# Altium PCB PCB1.PcbDoc
Units mil, origin at the board's own origin, x right, y up, seen from the top; angles counter-clockwise.
Board outline 6000 x 4000 mil, 2 copper layers (Top Layer, Bottom Layer); 22 components, 10 nets, 67 pads, 0 vias.
Unrouted connection lines stored in the file: 42.
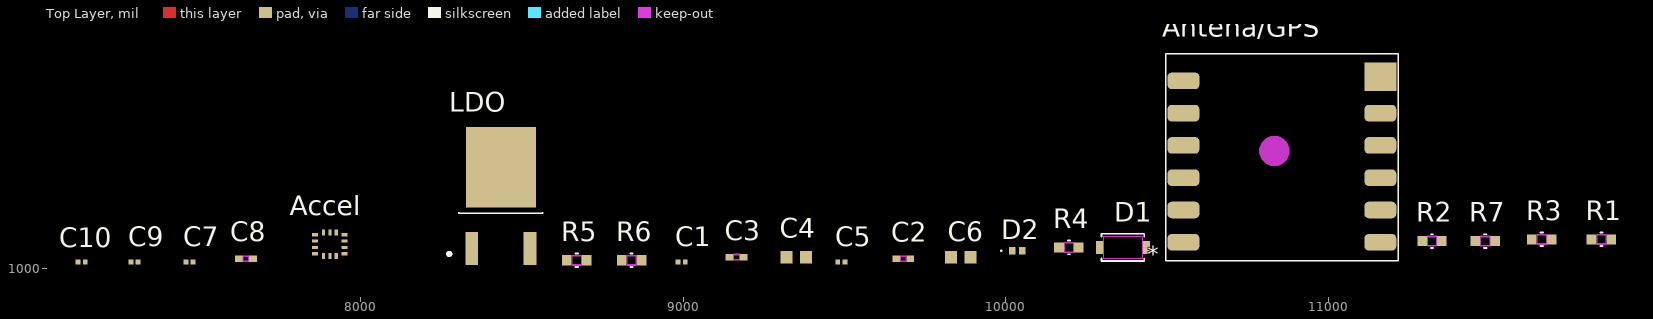
[diagram p0: Top Layer view]
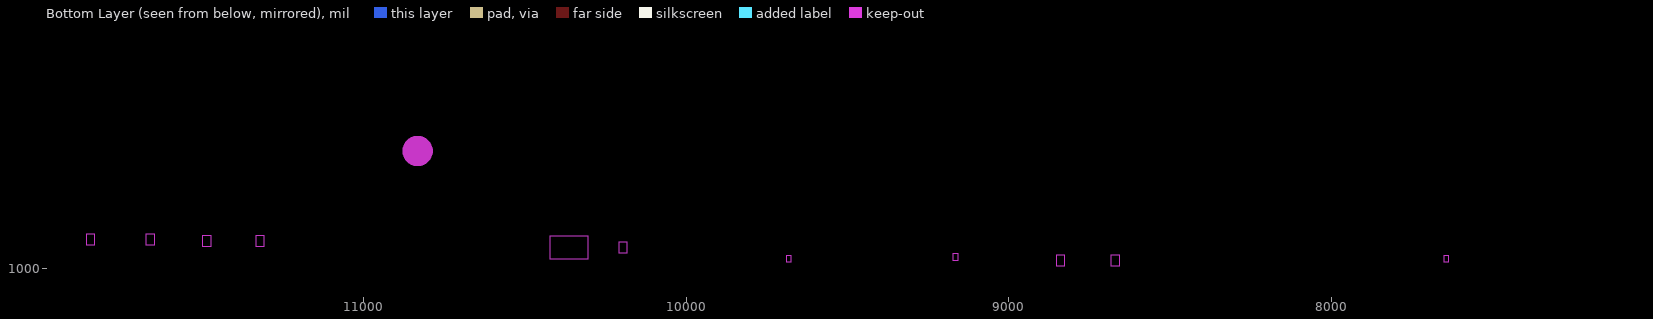
[diagram p1: Bottom Layer view, seen from below]

## Layer stack, top to bottom
Top Solder: solder mask 0.4, Solder Resist, Dk 3.5
Top Layer: signal copper 1.4
Dielectric 1: dielectric 12.6, FR-4, Dk 4.8
Bottom Layer: signal copper 1.4
Bottom Solder: solder mask 0.4, Solder Resist, Dk 3.5

## Board outline
1000,1000 7000,1000 7000,5000 1000,5000

## Design rules (kind name [scope] priority, off if disabled: settings)
Clearance [All] p1: gap=10 ignorepadtopadclearanceinfootprint=FALSE
PolygonConnect [All] p1: connectstyle=Relief reliefconductorwidth=10 reliefentries=4 polygonreliefangle="90 Angle" airgapwidth=10
RoutingVias [All] p1: holewidth=28 width=50 viastyle="Through Hole" minholewidth=28 minwidth=50 maxholewidth=28 maxwidth=50
SolderMaskExpansion [All] p1: expansion=4 istentingtop=FALSE
SupplyNets "Schematic Supply Nets_2" [InNet('+3.3V')] p1: voltage=0.000
SupplyNets "Schematic Supply Nets_1" [InNet('+5V')] p2: voltage=0.000
SupplyNets "Schematic Supply Nets" [InNet('GND')] p3: voltage=0.000
Width [All] p1: maxlimit=10 minlimit=10 preferedwidth=10
30 further rules are at their usual default settings.

## Components (designator, comment, footprint, x,y, rotation, side; value= is the part's Value field where it differs from the comment)
Accel "LSM6DSO32" "14-LGA - STMicroelectronics V4" 7905,1075 r0 top
Antena/GPS "Quectel LC86G" Quectel-LC86L 10855,1345 r0 top
C1 "100nF" CAPC0603X33N 8995,1020 r0 top
C2 "33pF" CAP_CL05_SAM 9681.76,1030 r180 top
C3 "33pF" CAP_CL05_SAM 9165,1035 r180 top
C4 "4.7µF" 0603-capacitor4.7uf 9350,1035 r0 top
C5 "100nF" CAPC0603X33N 9490,1020 r0 top
C6 "4.7µF" 0603-capacitor4.7uf 9860,1035 r0 top
C7 "100nF" CAPC0603X33N 7470,1020 r0 top
C8 "10µF" CAP_CL05_SAM 7645,1030 r0 top
C9 "100nF" CAPC0603X33N 7300,1020 r0 top
C10 "100nF" CAPC0603X33N 7136.06,1020 r180 top
D1 "SMD110PL-TP" SOD-123FL_MCC 10362.5,1065 r180 top
D2 "CSPSBULC3V3LB-TP" CSPSBULC3V3LBTP 10035,1055 r0 top
LDO "LD1117" "DPAK-LD1117DT33TR V2" 8435,1225 r90 top
R1 "1kΩ" RC0603N_YAG 11845,1090 r180 top
R2 "1kΩ" RC0603N_YAG 11320,1085 r180 top
R3 "5.6kΩ" RC0603N_YAG 11660,1090 r180 top
R4 "1kΩ" RC0603N_YAG 10195,1065 r180 top
R5 "10kΩ" RC0603N_YAG 8670,1025 r180 top
R6 "10kΩ" RC0603N_YAG 8840,1025 r180 top
R7 "10kΩ" RC0603N_YAG 11485,1085 r180 top

## Footprints (in the part's own frame and the unit in brackets; to place one, negate y for a bottom-side part, rotate by r counter-clockwise, add the part's x,y. Pads: shape width x height; smd on the part's side, far side on the other; paste and mask are expansions set on the pad)
"14-LGA - STMicroelectronics V4" [mm] "LGA, 14-Leads, Body 3,00x2,50mmx0,86mm, Pitch 0,50mm"
  rect 0.475x0.25 smd: 1(-1.162,0.75) 2(-1.162,0.25) 3(-1.162,-0.25) 4(-1.162,-0.75) 8(1.163,-0.75) 9(1.163,-0.25) 10(1.163,0.25) 11(1.163,0.75)
  rect 0.25x0.475 smd: 5(-0.5,-0.912) 6(0,-0.912) 7(0.5,-0.912) 12(0.5,0.912) 13(0,0.912) 14(-0.5,0.912)
  body extent -1.55,-1.3 1.55,1.3, height 0.86
0603-capacitor4.7uf [mm] "Chip Capacitor, 2-Leads, Body 1,60x0,80mm, IPC Medium Density"
  rect 0.95x1 smd: 1(-0.775,0) 2(0.775,0)
  body extent -0.9,-0.5 0.9,0.5, height 0.9
CAP_CL05_SAM [mm]
  rect 0.606x0.5 smd paste+0 mask+0: 1(-0.553,0) 2(0.553,0)
  Top Layer keep-out region: -0.199,-0.199 -0.199,0.199 0.199,0.199 0.199,-0.199
  Keep-Out Layer region: -0.199,-0.25 -0.199,0.25 0.199,0.25 0.199,-0.25
  body extent -0.5,-0.25 0.5,0.25, height 0.55
CAPC0603X33N [mm]
  rect 0.38x0.4 smd: 1(-0.281,0) 2(0.281,0)
  body extent -0.3,-0.15 0.3,0.15, height 0.33
CSPSBULC3V3LBTP [mm]
  rect 0.5x0.6 smd: 1(-0.4,0) 2(0.4,0)
  silkscreen extent -1.3,-0.05 -1.2,0.05, body extent -0.6,-0.3 0.6,0.3, height 0.65
"DPAK-LD1117DT33TR V2" [mm]
  rect 2.6x1 smd: 1(-4.15,2.29) 3(-4.15,-2.29)
  rect 6.3x5.5 smd: 2(2.25,0)
  silkscreen extent -4.7,-3.3 -1.3,4.19, body extent -3.88,-3.3 5.85,3.3, height 2.43
Quectel-LC86L [mm]
  rrect50% 2.5x1.3 smd: 1(-7.75,5.999) 2(-7.75,3.459) 3(-7.75,0.919) 4(-7.75,-1.621) 5(-7.75,-4.161) 6(-7.75,-6.701) 7(7.75,-6.701) 8(7.75,-4.161) 9(7.75,-1.621) 10(7.75,0.919) 11(7.75,3.459)
  rect 2.5x2.25 smd: 12(7.75,6.326)
  Keep-Out Layer circle w1.2: c-0.59,0.482 r0.6
  silkscreen extent -9.15,-8.15 9.15,8.15, body extent -8.01,-8 8,8.03, height 6.95
RC0603N_YAG [mil]
  rect 30x32 smd paste+0 mask+0: 1(-30.5,0) 2(30.5,0)
  Top Layer keep-out region: -13.5,-14 -13.5,14 13.5,14 13.5,-14
  Keep-Out Layer region: -13.5,-16 -13.5,16 13.5,16 13.5,-16
  silkscreen extent -3,-21 3,21, body extent -31,-16 31,16, height 28
SOD-123FL_MCC [mil]
  rect 23x41 smd paste+0 mask+0: 1(-72.5,0) 2(72.5,0)
  Top Layer keep-out region: -59,-35.5 -59,35.5 59,35.5 59,-35.5
  Keep-Out Layer region: -59,-35.5 -59,35.5 59,35.5 59,-35.5
  silkscreen extent -66,-43 66,43, body extent -76,-37 76,37, height 75

## Part data
Accel: "Accelerometer and 3D Gyroscope 3D Always-On 1.71V to 3.6V 0.55mA 14-Pin LGA T/R", Manufacturer=STMicroelectronics, Manufacturer Part Number=LSM6DSO32TR, Max Operating Temperature=85°C, Max Supply Voltage=3.6V, Min Operating Temperature=-40°C, Min Supply Voltage=1.71V, Operating Supply Current=550µA, Operating Supply Voltage=1.8V, Supplier Part Number=497-LSM6DSO32CT-ND, Body Material=Plastic, Category="Inertial Measurement Units (IMUs)", China RoHS=Compliant, ComponentLink1Description=https://datasheet.octopart.com:443/LSM6DSO32TR-STMicroelectronics-datasheet-152560011.pdf?src-supplier=Upverter, ComponentLink1URL=https://datasheet.octopart.com:443/LSM6DSO32TR-STMicroelectronics-datasheet-152560011.pdf?src-supplier=Upverter, Height=860µm, Length=3mm, Lifecycle Status=Production, Mounting Technology="Surface Mount", Number of Terminals=14, Output Configuration=Digital, Output Type=Digital, Pricing="1=3,64, 5=3,258, 10=3,115, 25=2,9448, 50=2,8282, 100=2,7213, 500=2,5064, 1000=2,45778 (USD)", REACH SVHC=Yes, RoHS=Compliant, Stock=5000, Supplier=DigiKey, Supplier 1=DigiKey, Supplier Part Number 1=497-LSM6DSO32CT-ND
Antena/GPS: "GNSS Module, BeiDou, Galileo, GLONASS, GPS, QZSS, 1.605375GHz, -166 dBm, 25 s, 2.55V to 3.6V", Manufacturer=Quectel, Manufacturer Part Number=LC86GLAMD, Max Operating Temperature=85°C, Min Operating Temperature=-40°C, Operating Supply Voltage=3.3V, Supplier Part Number=2958-LC86GLAMDCT-ND, Category="RF Transceiver Modules and Modems", ComponentLink1Description=https://datasheet.octopart.com:443/LC86GLAMD-Quectel-datasheet-165835560.pdf?src-supplier=SOS+electronic, ComponentLink1URL=https://datasheet.octopart.com:443/LC86GLAMD-Quectel-datasheet-165835560.pdf?src-supplier=SOS+electronic, Height - Seated (Max)=6.95mm, Length=18.4mm, Number of Circuits=1, Number of Terminals=36, Pricing="1=10,82, 10=9,402, 25=8,908, 100=8,2298 (USD)", Stock=191, Supplier=DigiKey, Supplier 1=DigiKey, Supplier Part Number 1=2958-LC86GLAMDCT-ND, Width=18.4mm
C1 C5 C7 C9 C10: library part "CAP - GENERIC", "0201 0.1 uF 16 V ±10% Tolerance X7S Multilayer Ceramic Chip Capacitor", .Case/Package=0201, .Voltage Rating (DC)=16V, Case Code (Metric)=0603, Dielectric=X7S, Dielectric Material=Ceramic, Manufacturer=Murata, Manufacturer Lifecycle Status="IN PRODUCTION", Manufacturer Part Number=GRM033C71C104KE14D, Max Operating Temperature=125°C, Min Operating Temperature=-55°C, Supplier Part Number=490-10387-1-ND, Tolerance=10%, Case Code (Imperial)=0201, Case/Package=0201, Category="Ceramic Capacitors", ComponentLink1Description=https://datasheet.octopart.com:443/GRM033C71C104KE14D-Murata-datasheet-178521774.pdf?src-supplier=Arrow.cn, ComponentLink1URL=https://datasheet.octopart.com:443/GRM033C71C104KE14D-Murata-datasheet-178521774.pdf?src-supplier=Arrow.cn, ComponentLink2Description=https://datasheet.octopart.com:443/GRM033C71C104KE14D-Murata-datasheet-150009099.pdf?src-supplier=Arrow.cn, ComponentLink2URL=https://datasheet.octopart.com:443/GRM033C71C104KE14D-Murata-datasheet-150009099.pdf?src-supplier=Arrow.cn, ComponentLink3Description=https://datasheet.octopart.com:443/GRM033C71C104KE14D-Murata-datasheet-165579666.pdf?src-supplier=TME, ComponentLink3URL=https://datasheet.octopart.com:443/GRM033C71C104KE14D-Murata-datasheet-165579666.pdf?src-supplier=TME, ComponentLink4Description=https://datasheet.octopart.com:443/GRM033C71C104KE14D-Murata-datasheet-141274204.pdf?src-supplier=Ciiva, ComponentLink4URL=https://datasheet.octopart.com:443/GRM033C71C104KE14D-Murata-datasheet-141274204.pdf?src-supplier=Ciiva, ComponentLink5Description=https://datasheet.octopart.com:443/GRM033C71C104KE14D-Murata-datasheet-140675366.pdf?src-supplier=Ciiva, ComponentLink5URL=https://datasheet.octopart.com:443/GRM033C71C104KE14D-Murata-datasheet-140675366.pdf?src-supplier=Ciiva, ComponentLink6Description=https://datasheet.octopart.com:443/GRM033C71C104KE14D-Murata-datasheet-138738157.pdf?src-supplier=Ciiva, ComponentLink6URL=https://datasheet.octopart.com:443/GRM033C71C104KE14D-Murata-datasheet-138738157.pdf?src-supplier=Ciiva, ComponentLink7Description=https://datasheet.octopart.com:443/GRM033C71C104KE14D-Murata-datasheet-22122223.pdf?src-supplier=Future+Electronics, ComponentLink7URL=https://datasheet.octopart.com:443/GRM033C71C104KE14D-Murata-datasheet-22122223.pdf?src-supplier=Future+Electronics, ComponentLink8Description=https://datasheet.octopart.com/GRM033C71C104KE14D-Murata-datasheet-12515295.pdf, ComponentLink8URL=https://datasheet.octopart.com/GRM033C71C104KE14D-Murata-datasheet-12515295.pdf, ComponentLink9Description=https://datasheet.octopart.com/GRM033C71C104KE14D-Murata-datasheet-12510076.pdf, ComponentLink9URL=https://datasheet.octopart.com/GRM033C71C104KE14D-Murata-datasheet-12510076.pdf, ComponentLink10Description=https://datasheet.octopart.com/GRM033C71C104KE14D-Murata-datasheet-11978611.pdf, ComponentLink10URL=https://datasheet.octopart.com/GRM033C71C104KE14D-Murata-datasheet-11978611.pdf, ComponentLink11Description=https://datasheet.octopart.com/GRM033C71C104KE14D-Murata-datasheet-10025737.pdf, ComponentLink11URL=https://datasheet.octopart.com/GRM033C71C104KE14D-Murata-datasheet-10025737.pdf, ComponentLink12Description=https://datasheet.octopart.com/GRM033C71C104KE14D-Murata-datasheet-8819587.pdf, ComponentLink12URL=https://datasheet.octopart.com/GRM033C71C104KE14D-Murata-datasheet-8819587.pdf, ComponentLink13Description=http://sigma.octopart.com:80/reach_statement/Murata-company-16.pdf?src-supplier=Compliance+Statements, ComponentLink13URL=http://sigma.octopart.com:80/reach_statement/Murata-company-16.pdf?src-supplier=Compliance+Statements, Height=300µm, Length=600µm, Lifecycle Status=Production, Material=Ceramic, Mounting Technology="Surface Mount", Number of Terminals=2, Packaging=Digi-Reel®, Pricing="1=0,08, 10=0,006, 50=0,0048, 100=0,004 (USD)", REACH SVHC=Yes, RoHS=Compliant, Schedule B="8532240020, 8532240020|8532240020, 8532240020|8532240020|8532240020, 8532240020|8532240020|8532240020|8532240020", Stock=10213357, Supplier=DigiKey, Supplier 1=DigiKey, Supplier Part Number 1=490-10387-1-ND, Termination=SMD/SMT, Thickness=300µm, Voltage Rating=16V, Voltage Rating (DC)=16V, Weight=340.194278µg, Width=300µm
C2 C3: library part "CAP - GENERIC", "Ceramic Capacitor, Multilayer, Ceramic, 50V, 5% +Tol, 5% -Tol, C0G, 0+-30ppm/Celcius TC, 33pF, Surface Mount, 0402 inch", .Case/Package=0402, .Voltage Rating (DC)=50V, Case Code (Metric)=1005, Dielectric=C0G, Dielectric Material=Ceramic, Manufacturer="Samsung Electro-Mechanics", Manufacturer Part Number=CL05C330JB5NNNC, Max Operating Temperature=125°C, Min Operating Temperature=-55°C, Supplier Part Number=1276-1272-1-ND, Temperature Coefficient=30ppm/°C, Tolerance=5%, Case Code (Imperial)=0402, Case/Package=0402, Category="Ceramic Capacitors", China RoHS=Compliant, ComponentLink1Description=https://datasheet.octopart.com:443/CL05C330JB5NNNC-Samsung-Electro-Mechanics-datasheet-136482269.pdf?src-supplier=IHS, ComponentLink1URL=https://datasheet.octopart.com:443/CL05C330JB5NNNC-Samsung-Electro-Mechanics-datasheet-136482269.pdf?src-supplier=IHS, ComponentLink2Description=https://datasheet.octopart.com:443/CL05C330JB5NNNC-Samsung-Electro-Mechanics-datasheet-141347004.pdf?src-supplier=Samsung+SCT, ComponentLink2URL=https://datasheet.octopart.com:443/CL05C330JB5NNNC-Samsung-Electro-Mechanics-datasheet-141347004.pdf?src-supplier=Samsung+SCT, ComponentLink3Description=https://datasheet.octopart.com:443/CL05C330JB5NNNC-Samsung-Electro-Mechanics-datasheet-110326805.pdf?src-supplier=Future+Electronics, ComponentLink3URL=https://datasheet.octopart.com:443/CL05C330JB5NNNC-Samsung-Electro-Mechanics-datasheet-110326805.pdf?src-supplier=Future+Electronics, ComponentLink4Description=https://datasheet.octopart.com:443/CL05C330JB5NNNC-Samsung-Electro-Mechanics-datasheet-81461748.pdf?src-supplier=Future+Electronics, ComponentLink4URL=https://datasheet.octopart.com:443/CL05C330JB5NNNC-Samsung-Electro-Mechanics-datasheet-81461748.pdf?src-supplier=Future+Electronics, ComponentLink5Description=https://datasheet.octopart.com:443/CL05C330JB5NNNC-Samsung-datasheet-12522687.pdf?src-supplier=Future+Electronics, ComponentLink5URL=https://datasheet.octopart.com:443/CL05C330JB5NNNC-Samsung-datasheet-12522687.pdf?src-supplier=Future+Electronics, ComponentLink6Description=https://datasheet.octopart.com:443/CL05C330JB5NNNC-Samsung-datasheet-26589087.pdf?src-supplier=Future+Electronics, ComponentLink6URL=https://datasheet.octopart.com:443/CL05C330JB5NNNC-Samsung-datasheet-26589087.pdf?src-supplier=Future+Electronics, ComponentLink7Description=https://datasheet.octopart.com:443/CL05C330JB5NNNC-Samsung-Electro-Mechanics-datasheet-149156440.pdf?src-supplier=Future+Electronics, ComponentLink7URL=https://datasheet.octopart.com:443/CL05C330JB5NNNC-Samsung-Electro-Mechanics-datasheet-149156440.pdf?src-supplier=Future+Electronics, ComponentLink8Description=https://datasheet.octopart.com:443/CL05C330JB5NNNC-Samsung-datasheet-37081328.pdf?src-supplier=Future+Electronics, ComponentLink8URL=https://datasheet.octopart.com:443/CL05C330JB5NNNC-Samsung-datasheet-37081328.pdf?src-supplier=Future+Electronics, ComponentLink9Description=https://datasheet.octopart.com/CL05C330JB5NNNC-Samsung-Electro-Mechanics-datasheet-97040617.pdf, ComponentLink9URL=https://datasheet.octopart.com/CL05C330JB5NNNC-Samsung-Electro-Mechanics-datasheet-97040617.pdf, ComponentLink10Description=https://datasheet.octopart.com/CL05C330JB5NNNC-Samsung-Electro-Mechanics-datasheet-8324245.pdf, ComponentLink10URL=https://datasheet.octopart.com/CL05C330JB5NNNC-Samsung-Electro-Mechanics-datasheet-8324245.pdf, ComponentLink11Description=https://datasheet.octopart.com:443/CL05C330JB5NNNC-Samsung-datasheet-8326407.pdf?src-supplier=TME, ComponentLink11URL=https://datasheet.octopart.com:443/CL05C330JB5NNNC-Samsung-datasheet-8326407.pdf?src-supplier=TME, Contact Plating=Tin, Depth=500µm, Height=550µm, Lead Free="Lead Free", Length=1mm, Lifecycle Status=Production, Material=Ceramic, Mounting Technology="Surface Mount", Number of Terminals=2, Pricing="1=0,08, 10=0,003 (USD)", Radiation Hardening=No, REACH SVHC=Yes, RoHS=Compliant, Schedule B="8532240020, 8532240020|8532240020, 8532240020|8532240020|8532240020, 8532240020|8532240020|8532240020|8532240020", Stock=3272452, Supplier=DigiKey, Supplier 1=DigiKey, Supplier Part Number 1=1276-1272-1-ND, Thickness=558.8µm, Voltage=50V, Voltage Rating=50V, Voltage Rating (DC)=50V, Width=500µm
C4 C6: library part "CAP - GENERIC", "Ceramic Capacitor, Multilayer, Ceramic, 10V, 10% +Tol, 10% -Tol, X7R, 15% TC, 4.7uF, Surface Mount, 0603", .Case/Package=0603, .Voltage Rating (DC)=10V, Dielectric Material=Ceramic, Manufacturer="Cal-Chip Electronics", Manufacturer Part Number=GMC10X7R475K10NT, Max Operating Temperature=125°C, Min Operating Temperature=-55°C, Supplier Part Number=4713-GMC10X7R475K10NTCT-ND, Category="Ceramic Capacitors", China RoHS=Compliant, ComponentLink1Description=https://datasheet.octopart.com:443/GMC10X7R475K10NT-Cal-Chip-Electronics-datasheet-182028815.pdf?src-supplier=IHS, ComponentLink1URL=https://datasheet.octopart.com:443/GMC10X7R475K10NT-Cal-Chip-Electronics-datasheet-182028815.pdf?src-supplier=IHS, Height=900µm, Length=1.6mm, Lifecycle Status=Production, Mounting Technology="Surface Mount", Number of Terminals=2, Pricing="1=0,26, 10=0,154, 50=0,1112, 100=0,0982, 500=0,07628, 1000=0,06951, 4000=0,05938, 8000=0,05562, 12000=0,05374, 20000=0,05165, 28000=0,05043, 40000=0,04926, 48000=0,0487, 96000=0,04683, 100000=0,04673 (USD)", REACH SVHC=Yes, RoHS=Compliant, Stock=237673, Supplier=DigiKey, Supplier 1=DigiKey, Supplier Part Number 1=4713-GMC10X7R475K10NTCT-ND, Voltage Rating (DC)=10V, Width=800µm
C8: library part "CAP - GENERIC", "6.3V 10uF X5R ±20% 0402 Multilayer Ceramic Capacitors MLCC - SMD/SMT ROHS", .Case/Package=0402, .Voltage Rating (DC)=6.3V, Case Code (Metric)=1005, Dielectric=X5R, Dielectric Material=Ceramic, Manufacturer="Samsung Electro-Mechanics", Manufacturer Part Number=CL05A106MQ5NUNC, Max Operating Temperature=85°C, Min Operating Temperature=-55°C, Supplier Part Number=1276-1451-1-ND, Tolerance=20%, Case Code (Imperial)=0402, Case/Package=0402, Category="Ceramic Capacitors", China RoHS=Compliant, ComponentLink1Description=https://datasheet.octopart.com:443/CL05A106MQ5NUNC-Samsung-Electro-Mechanics-datasheet-136031724.pdf?src-supplier=Newark, ComponentLink1URL=https://datasheet.octopart.com:443/CL05A106MQ5NUNC-Samsung-Electro-Mechanics-datasheet-136031724.pdf?src-supplier=Newark, ComponentLink2Description=https://datasheet.octopart.com:443/CL05A106MQ5NUNC-Samsung-Electro-Mechanics-datasheet-181551184.pdf?src-supplier=Newark, ComponentLink2URL=https://datasheet.octopart.com:443/CL05A106MQ5NUNC-Samsung-Electro-Mechanics-datasheet-181551184.pdf?src-supplier=Newark, ComponentLink3Description=https://datasheet.octopart.com:443/CL05A106MQ5NUNC-Samsung-Electro-Mechanics-datasheet-110226207.pdf?src-supplier=Future+Electronics, ComponentLink3URL=https://datasheet.octopart.com:443/CL05A106MQ5NUNC-Samsung-Electro-Mechanics-datasheet-110226207.pdf?src-supplier=Future+Electronics, ComponentLink4Description=https://datasheet.octopart.com:443/CL05A106MQ5NUNC-Samsung-Electro-Mechanics-datasheet-81461596.pdf?src-supplier=Future+Electronics, ComponentLink4URL=https://datasheet.octopart.com:443/CL05A106MQ5NUNC-Samsung-Electro-Mechanics-datasheet-81461596.pdf?src-supplier=Future+Electronics, ComponentLink5Description=https://datasheet.octopart.com:443/CL05A106MQ5NUNC-Samsung-datasheet-42280528.pdf?src-supplier=Future+Electronics, ComponentLink5URL=https://datasheet.octopart.com:443/CL05A106MQ5NUNC-Samsung-datasheet-42280528.pdf?src-supplier=Future+Electronics, ComponentLink6Description=https://datasheet.octopart.com:443/CL05A106MQ5NUNC-Samsung-datasheet-34153003.pdf?src-supplier=Future+Electronics, ComponentLink6URL=https://datasheet.octopart.com:443/CL05A106MQ5NUNC-Samsung-datasheet-34153003.pdf?src-supplier=Future+Electronics, ComponentLink7Description=https://datasheet.octopart.com:443/CL05A106MQ5NUNC-Samsung-datasheet-26589001.pdf?src-supplier=Future+Electronics, ComponentLink7URL=https://datasheet.octopart.com:443/CL05A106MQ5NUNC-Samsung-datasheet-26589001.pdf?src-supplier=Future+Electronics, ComponentLink8Description=https://datasheet.octopart.com:443/CL05A106MQ5NUNC-Samsung-datasheet-12538126.pdf?src-supplier=Future+Electronics, ComponentLink8URL=https://datasheet.octopart.com:443/CL05A106MQ5NUNC-Samsung-datasheet-12538126.pdf?src-supplier=Future+Electronics, ComponentLink9Description=https://datasheet.octopart.com:443/CL05A106MQ5NUNC-Samsung-Electro-Mechanics-datasheet-149136671.pdf?src-supplier=Future+Electronics, ComponentLink9URL=https://datasheet.octopart.com:443/CL05A106MQ5NUNC-Samsung-Electro-Mechanics-datasheet-149136671.pdf?src-supplier=Future+Electronics, ComponentLink10Description=https://datasheet.octopart.com:443/CL05A106MQ5NUNC-Samsung-datasheet-59220082.pdf?src-supplier=TME, ComponentLink10URL=https://datasheet.octopart.com:443/CL05A106MQ5NUNC-Samsung-datasheet-59220082.pdf?src-supplier=TME, Depth=500µm, Height=700µm, Length=1mm, Lifecycle Status=Production, Mounting Technology="Surface Mount", Number of Terminals=2, Pricing="1=0,1, 10=0,054, 50=0,0464, 2500=0,044, 5000=0,0407 (USD)", Radiation Hardening=No, REACH SVHC=Yes, RoHS=Compliant, Schedule B="8532240020, 8532240020|8532240020, 8532240020|8532240020|8532240020, 8532240020|8532240020|8532240020|8532240020", Stock=3652212, Supplier=DigiKey, Supplier 1=DigiKey, Supplier Part Number 1=1276-1451-1-ND, Thickness=711.2µm, Voltage Rating=6.3V, Voltage Rating (DC)=6.3V, Width=500µm
D1: library part DIODE, "Rectifier Diode, Schottky, 1 Phase, 1 Element, 1A, 100V V(RRM), Silicon", .Case/Package=SOD-123FL, .Current=1A, Forward Voltage=850mV, Manufacturer=MCC, Max Forward Surge Current (Ifsm)=30A, Max Operating Temperature=150°C, Max Repetitive Reverse Voltage (Vrrm)=100V, Min Operating Temperature=-55°C, Peak Reverse Current=10µA, Supplier Part Number=SMD110PL-TPMSDKR-ND, Average Rectified Current=1A, Category="Rectifier Diodes", China RoHS=Non-Compliant, ComponentLink1Description=https://datasheet.octopart.com:443/SMD110PL-TP-MCC-datasheet-103922842.pdf?src-supplier=Future+Electronics, ComponentLink1URL=https://datasheet.octopart.com:443/SMD110PL-TP-MCC-datasheet-103922842.pdf?src-supplier=Future+Electronics, ComponentLink2Description=https://datasheet.octopart.com:443/SMD110PL-TP-MCC-datasheet-27907079.pdf?src-supplier=Future+Electronics, ComponentLink2URL=https://datasheet.octopart.com:443/SMD110PL-TP-MCC-datasheet-27907079.pdf?src-supplier=Future+Electronics, Element Configuration=Single, Forward Current=1A, Lead Free="Lead Free", Lifecycle Status=Production, Manufacturer Part Number=SMD110PL-TP, Max Output current=1A, Max Reverse Voltage (DC)=100V, Mounting Technology="Surface Mount", Number of Elements=1, Number of Terminals=2, Packaging="Tape and Reel", Peak Non-Repetitive Surge Current=30A, Pins=2, Pricing="1=0,19, 10=0,118, 100=0,0796, 500=0,05812, 1000=0,05115 (USD)", Radiation Hardening=No, REACH SVHC=No, Reverse Standoff Voltage=100V, RoHS=Compliant, Schedule B="8541100080, 8541100080|8541100080|8541100080|8541100080|8541100080", Stock=3407126, Supplier=DigiKey
D2: library part DIODE, "Trans Voltage Suppressor Diode, 13W, 3.3V V(RWM), Bidirectional, 1 Element, Silicon", .Case/Package=CSP1006-2, .Current=5A, Breakdown Voltage=6.5V, Clamping Voltage=2.9V, Manufacturer=MCC, Max Breakdown Voltage=8V, Max Operating Temperature=125°C, Min Breakdown Voltage=4.5V, Min Operating Temperature=-55°C, Peak Pulse Power=13W, Peak Reverse Current=100nA, Reverse Standoff Voltage=3.3V, Supplier Part Number=353-CSPSBULC3V3LB-TPCT-ND, Category="TVS Diodes", Lifecycle Status=Production, Manufacturer Part Number=CSPSBULC3V3LB-TP, Number of Elements=1, Number of Terminals=2, Polarity=Bidirectional, Pricing="1=0,23, 10=0,152, 100=0,076, 500=0,06174, 1000=0,044, 2000=0,041, 5000=0,036 (USD)", REACH SVHC=Yes, RoHS=Compliant, Stock=8320, Supplier=DigiKey
LDO: "Output ail-to- ail Very-Low-Noise Operational Amplifier 14-SOIC -40 to 125", Case/Package=TO-252, Dropout Voltage=1.1V, Input Bias Current=5mA, Manufacturer=STMicroelectronics, Manufacturer Part Number=LD1117DT33TR, Max Junction Temperature (Tj)=125°C, Max Output current=1.3A, Max Power Dissipation=12W, Max Supply Voltage=15V, Min Input Voltage=4.75V, Min Operating Temperature=0°C, Nominal Output Voltage=3.3V, Output Current=800mA, Output Voltage Accuracy=1%, Supplier Part Number=497-1236-1-ND, Voltage Tolerance=2%, Accuracy=1%, Category="LDO Voltage Regulators", China RoHS=Non-Compliant, ComponentLink1Description=https://datasheet.octopart.com:443/LD1117DT33TR-STMicroelectronics-datasheet-21631343.pdf?src-supplier=element14+APAC, ComponentLink1URL=https://datasheet.octopart.com:443/LD1117DT33TR-STMicroelectronics-datasheet-21631343.pdf?src-supplier=element14+APAC, ComponentLink2Description=https://datasheet.octopart.com:443/LD1117DT33TR-STMicroelectronics-datasheet-12512609.pdf?src-supplier=Upverter, ComponentLink2URL=https://datasheet.octopart.com:443/LD1117DT33TR-STMicroelectronics-datasheet-12512609.pdf?src-supplier=Upverter, ComponentLink3Description=https://datasheet.octopart.com:443/LD1117DT33TR-STMicroelectronics-datasheet-10835789.pdf?src-supplier=Upverter, ComponentLink3URL=https://datasheet.octopart.com:443/LD1117DT33TR-STMicroelectronics-datasheet-10835789.pdf?src-supplier=Upverter, ComponentLink4Description=https://datasheet.octopart.com:443/LD1117DT33TR-STMicroelectronics-datasheet-10544930.pdf?src-supplier=Upverter, ComponentLink4URL=https://datasheet.octopart.com:443/LD1117DT33TR-STMicroelectronics-datasheet-10544930.pdf?src-supplier=Upverter, ComponentLink5Description=https://datasheet.octopart.com:443/LD1117DT33TR-STMicroelectronics-datasheet-10390305.pdf?src-supplier=Upverter, ComponentLink5URL=https://datasheet.octopart.com:443/LD1117DT33TR-STMicroelectronics-datasheet-10390305.pdf?src-supplier=Upverter, ComponentLink6Description=https://datasheet.octopart.com:443/LD1117DT33TR-STMicroelectronics-datasheet-8082140.pdf?src-supplier=element14, ComponentLink6URL=https://datasheet.octopart.com:443/LD1117DT33TR-STMicroelectronics-datasheet-8082140.pdf?src-supplier=element14, ComponentLink7Description=https://datasheet.octopart.com:443/LD1117DT33TR-STMicroelectronics-datasheet-8710537.pdf?src-supplier=element14, ComponentLink7URL=https://datasheet.octopart.com:443/LD1117DT33TR-STMicroelectronics-datasheet-8710537.pdf?src-supplier=element14, ComponentLink8Description=https://datasheet.octopart.com:443/LD1117DT33TR-STMicroelectronics-datasheet-8453752.pdf?src-supplier=element14, ComponentLink8URL=https://datasheet.octopart.com:443/LD1117DT33TR-STMicroelectronics-datasheet-8453752.pdf?src-supplier=element14, ComponentLink9Description=https://datasheet.octopart.com:443/LD1117DT33TR-STMicroelectronics-datasheet-9746.pdf?src-supplier=DigiKey, ComponentLink9URL=https://datasheet.octopart.com:443/LD1117DT33TR-STMicroelectronics-datasheet-9746.pdf?src-supplier=DigiKey, ComponentLink10Description=https://datasheet.octopart.com:443/LD1117DT33TR-STMicroelectronics-datasheet-14168930.pdf?src-supplier=iiiC, ComponentLink10URL=https://datasheet.octopart.com:443/LD1117DT33TR-STMicroelectronics-datasheet-14168930.pdf?src-supplier=iiiC, ComponentLink11Description=https://datasheet.octopart.com:443/LD1117DT33TR-STMicroelectronics-datasheet-5314031.pdf?src-supplier=Nu+Horizons, ComponentLink11URL=https://datasheet.octopart.com:443/LD1117DT33TR-STMicroelectronics-datasheet-5314031.pdf?src-supplier=Nu+Horizons, ComponentLink12Description=https://datasheet.octopart.com:443/LD1117DT33TR-STMicroelectronics-datasheet-502396.pdf?src-supplier=Nu+Horizons, ComponentLink12URL=https://datasheet.octopart.com:443/LD1117DT33TR-STMicroelectronics-datasheet-502396.pdf?src-supplier=Nu+Horizons, ComponentLink13Description=https://datasheet.octopart.com:443/LD1117DT33TR-STMicroelectronics-datasheet-109521.pdf?src-supplier=Nu+Horizons, ComponentLink13URL=https://datasheet.octopart.com:443/LD1117DT33TR-STMicroelectronics-datasheet-109521.pdf?src-supplier=Nu+Horizons, ComponentLink14Description=https://datasheet.octopart.com:443/LD1117DT33TR-STMicroelectronics-datasheet-7556021.pdf?src-supplier=Jameco, ComponentLink14URL=https://datasheet.octopart.com:443/LD1117DT33TR-STMicroelectronics-datasheet-7556021.pdf?src-supplier=Jameco, ComponentLink15Description=https://datasheet.octopart.com:443/LD1117DT33TR-STMicroelectronics-datasheet-113917.pdf?src-supplier=Sierra+IC, ComponentLink15URL=https://datasheet.octopart.com:443/LD1117DT33TR-STMicroelectronics-datasheet-113917.pdf?src-supplier=Sierra+IC, Contact Plating=Tin, Height=2.4mm, Height - Seated (Max)=2.3mm, Length=6.5mm, Lifecycle Status=Production, Max Operating Temperature=125°C, Mounting Technology="Surface Mount", Nominal Supply Current=5mA, Number of Channels=1, Number of Circuits=1, Number of Outputs=1, Number of Regulators=1, Number of Terminals=2, Output Type=Fixed, Output Voltage=3.3V, Packaging="Tape and Reel", Pins=3, Polarity=Positive, Power Dissipation=12W, Power Rating=12W, Pricing="1=0,48, 10=0,339, 25=0,3028, 100=0,2629, 250=0,24392, 500=0,23244, 1000=0,22299 (USD)", Quiescent Current=5mA, Radiation Hardening=No, REACH SVHC=No, RoHS=Compliant, Schedule B="8542390000, 8542390000|8542390000|8542390000|8542390000|8542390000", Stock=24539, Supplier=DigiKey, Supplier 1=DigiKey, Supplier Part Number 1=497-1236-1-ND, Terminal Pitch=2.28mm, Tolerance=1%, Weight=4.535924g, Width=6.1mm
R1 R2 R4: library part "RESISTOR - GENERIC", "Fixed Resistor, Thin Film, 0.1W, 1000ohm, 75V, 1% +/-Tol, 50ppm/Cel, Surface Mount, 0603", .Case/Package=0603, .Tolerance=1%, Manufacturer="Yageo Group", Manufacturer Part Number=RT0603FRE071KL, Max Operating Temperature=155°C, Max Power Dissipation=100mW, Min Operating Temperature=-55°C, Supplier Part Number=YAG2323CT-ND, Temperature Coefficient=50ppm/°C, Voltage Rating=75V, Case Code (Imperial)=0603, Case/Package=0603, Category="Chip SMD Resistors", China RoHS=Non-Compliant, ComponentLink1Description=https://datasheet.octopart.com:443/RT0603FRE071KL-Yageo-datasheet-176402239.pdf?src-supplier=IHS, ComponentLink1URL=https://datasheet.octopart.com:443/RT0603FRE071KL-Yageo-datasheet-176402239.pdf?src-supplier=IHS, ComponentLink2Description=https://datasheet.octopart.com:443/RT0603FRE071KL-Yageo-datasheet-10915759.pdf?src-supplier=element14+APAC, ComponentLink2URL=https://datasheet.octopart.com:443/RT0603FRE071KL-Yageo-datasheet-10915759.pdf?src-supplier=element14+APAC, ComponentLink3Description=https://datasheet.octopart.com:443/RT0603FRE071KL-Yageo-datasheet-67645616.pdf?src-supplier=element14+APAC, ComponentLink3URL=https://datasheet.octopart.com:443/RT0603FRE071KL-Yageo-datasheet-67645616.pdf?src-supplier=element14+APAC, ComponentLink4Description=https://datasheet.octopart.com:443/RT0603FRE071KL-Yageo-datasheet-8324589.pdf?src-supplier=Newark, ComponentLink4URL=https://datasheet.octopart.com:443/RT0603FRE071KL-Yageo-datasheet-8324589.pdf?src-supplier=Newark, ComponentLink5Description=https://datasheet.octopart.com:443/RT0603FRE071KL-Yageo-datasheet-164439670.pdf?src-supplier=Newark, ComponentLink5URL=https://datasheet.octopart.com:443/RT0603FRE071KL-Yageo-datasheet-164439670.pdf?src-supplier=Newark, ComponentLink6Description=https://datasheet.octopart.com:443/RT0603FRE071KL-Yageo-datasheet-169971040.pdf?src-supplier=Future+Electronics, ComponentLink6URL=https://datasheet.octopart.com:443/RT0603FRE071KL-Yageo-datasheet-169971040.pdf?src-supplier=Future+Electronics, ComponentLink7Description=https://datasheet.octopart.com:443/RT0603FRE071KL-Yageo-datasheet-166250672.pdf?src-supplier=Future+Electronics, ComponentLink7URL=https://datasheet.octopart.com:443/RT0603FRE071KL-Yageo-datasheet-166250672.pdf?src-supplier=Future+Electronics, ComponentLink8Description=https://datasheet.octopart.com:443/RT0603FRE071KL-Yageo-datasheet-136673517.pdf?src-supplier=Future+Electronics, ComponentLink8URL=https://datasheet.octopart.com:443/RT0603FRE071KL-Yageo-datasheet-136673517.pdf?src-supplier=Future+Electronics, ComponentLink9Description=https://datasheet.octopart.com:443/RT0603FRE071KL-Yageo-datasheet-137700930.pdf?src-supplier=Future+Electronics, ComponentLink9URL=https://datasheet.octopart.com:443/RT0603FRE071KL-Yageo-datasheet-137700930.pdf?src-supplier=Future+Electronics, ComponentLink10Description=https://datasheet.octopart.com:443/RT0603FRE071KL-Yageo-datasheet-96443642.pdf?src-supplier=Future+Electronics, ComponentLink10URL=https://datasheet.octopart.com:443/RT0603FRE071KL-Yageo-datasheet-96443642.pdf?src-supplier=Future+Electronics, ComponentLink11Description=https://datasheet.octopart.com:443/RT0603FRE071KL-Yageo-datasheet-68361100.pdf?src-supplier=Future+Electronics, ComponentLink11URL=https://datasheet.octopart.com:443/RT0603FRE071KL-Yageo-datasheet-68361100.pdf?src-supplier=Future+Electronics, ComponentLink12Description=https://datasheet.octopart.com:443/RT0603FRE071KL-Yageo-datasheet-41589729.pdf?src-supplier=Future+Electronics, ComponentLink12URL=https://datasheet.octopart.com:443/RT0603FRE071KL-Yageo-datasheet-41589729.pdf?src-supplier=Future+Electronics, ComponentLink13Description=https://datasheet.octopart.com:443/RT0603FRE071KL-Yageo-datasheet-12594463.pdf?src-supplier=Future+Electronics, ComponentLink13URL=https://datasheet.octopart.com:443/RT0603FRE071KL-Yageo-datasheet-12594463.pdf?src-supplier=Future+Electronics, ComponentLink14Description=https://datasheet.octopart.com:443/RT0603FRE071KL-Yageo-datasheet-34924148.pdf?src-supplier=Future+Electronics, ComponentLink14URL=https://datasheet.octopart.com:443/RT0603FRE071KL-Yageo-datasheet-34924148.pdf?src-supplier=Future+Electronics, ComponentLink15Description=https://datasheet.octopart.com:443/RT0603FRE071KL-Yageo-Group-datasheet-141265893.pdf?src-supplier=ODG+(Origin+Data+Global), ComponentLink15URL=https://datasheet.octopart.com:443/RT0603FRE071KL-Yageo-Group-datasheet-141265893.pdf?src-supplier=ODG+(Origin+Data+Global), ComponentLink16Description=https://datasheet.octopart.com:443/RT0603FRE071KL-Yageo-datasheet-83209228.pdf?src-supplier=SOS+electronic, ComponentLink16URL=https://datasheet.octopart.com:443/RT0603FRE071KL-Yageo-datasheet-83209228.pdf?src-supplier=SOS+electronic, ComponentLink17Description=https://datasheet.octopart.com/RT0603FRE071KL-Yageo-datasheet-86813807.pdf, ComponentLink17URL=https://datasheet.octopart.com/RT0603FRE071KL-Yageo-datasheet-86813807.pdf, ComponentLink18Description=http://sigma.octopart.com:80/rohs_statement/Yageo-company-2.pdf?src-supplier=Compliance+Statements, ComponentLink18URL=http://sigma.octopart.com:80/rohs_statement/Yageo-company-2.pdf?src-supplier=Compliance+Statements, ComponentLink19Description=http://sigma.octopart.com:80/conflict_mineral_statement/Yageo-company-3.pdf?src-supplier=Compliance+Statements, ComponentLink19URL=http://sigma.octopart.com:80/conflict_mineral_statement/Yageo-company-3.pdf?src-supplier=Compliance+Statements, Composition="Thin Film", Contact Plating="Lead, Tin", Depth=800µm, Features="Moisture Resistant", Height=450µm, Lead Free="Lead Free", Length=1.6mm, Lifecycle Status=Production, Military Standard=Not, Mounting Technology="Surface Mount", Number of Terminals=2, Number of Terminations=2, Packaging="Tape & Reel", Pins=2, Power Dissipation=100mW, Power Rating=100mW, Pricing="1=0,1, 10=0,014, 25=0,0112, 50=0,0082, 100=0,0081, 250=0,00764 (USD)", REACH SVHC=Yes, RoHS=Compliant, Schedule B="8533210045, 8533210045|8533210045|8533210045|8533210045|8533210045|8533210045|8533210045|8533210045|8533210045|8533210045|8533210045|8533210045|8533210045|8533210045|8533210045|8533210045|8533210045|8533210045|8533210045|8533210045|8533210045|8533210045|8533210045|85", Stock=146447, Supplier=DigiKey, Supplier 1=DigiKey, Supplier Part Number 1=YAG2323CT-ND, Termination=SMD/SMT, Tolerance=1%, Voltage Rating (DC)=75V, Width=800µm, Working Voltage=75V
R3: library part "RESISTOR - GENERIC", "Res Thick Film 0603 5.6K Ohm 1% 0.1W(1/10W) ±100ppm/C Pad SMD T/R", .Case/Package=0603, .Tolerance=1%, Case Code (Metric)=1608, Manufacturer="Yageo Group", Manufacturer Part Number=RC0603FR-075K6L, Max Operating Temperature=155°C, Max Power Dissipation=100mW, Min Operating Temperature=-55°C, Supplier Part Number=311-5.60KHRCT-ND, Temperature Coefficient=100ppm/°C, Voltage Rating=50V, Working Voltage=75V, Case Code (Imperial)=0603, Case/Package=0603, Category="Chip SMD Resistors", China RoHS=Non-Compliant, ComponentLink1Description=https://datasheet.octopart.com:443/RC0603FR-075K6L-Yageo-datasheet-175887523.pdf?src-supplier=IHS, ComponentLink1URL=https://datasheet.octopart.com:443/RC0603FR-075K6L-Yageo-datasheet-175887523.pdf?src-supplier=IHS, ComponentLink2Description=https://datasheet.octopart.com:443/RC0603FR-075K6L-Yageo-datasheet-62067350.pdf?src-supplier=Newark, ComponentLink2URL=https://datasheet.octopart.com:443/RC0603FR-075K6L-Yageo-datasheet-62067350.pdf?src-supplier=Newark, ComponentLink3Description=https://datasheet.octopart.com:443/RC0603FR-075K6L-Yageo-datasheet-8328172.pdf?src-supplier=Newark, ComponentLink3URL=https://datasheet.octopart.com:443/RC0603FR-075K6L-Yageo-datasheet-8328172.pdf?src-supplier=Newark, ComponentLink4Description=https://datasheet.octopart.com:443/RC0603FR-075K6L-Yageo-datasheet-34211833.pdf?src-supplier=Newark, ComponentLink4URL=https://datasheet.octopart.com:443/RC0603FR-075K6L-Yageo-datasheet-34211833.pdf?src-supplier=Newark, ComponentLink5Description=https://datasheet.octopart.com:443/RC0603FR-075K6L-Yageo-datasheet-503470.pdf?src-supplier=Newark, ComponentLink5URL=https://datasheet.octopart.com:443/RC0603FR-075K6L-Yageo-datasheet-503470.pdf?src-supplier=Newark, ComponentLink6Description=https://datasheet.octopart.com:443/RC0603FR-075K6L-Yageo-Group-datasheet-176638170.pdf?src-supplier=Newark, ComponentLink6URL=https://datasheet.octopart.com:443/RC0603FR-075K6L-Yageo-Group-datasheet-176638170.pdf?src-supplier=Newark, ComponentLink7Description=https://datasheet.octopart.com:443/RC0603FR-075K6L-Yageo-datasheet-103092701.pdf?src-supplier=Upverter, ComponentLink7URL=https://datasheet.octopart.com:443/RC0603FR-075K6L-Yageo-datasheet-103092701.pdf?src-supplier=Upverter, ComponentLink8Description=https://datasheet.octopart.com:443/RC0603FR-075K6L-Yageo-datasheet-98239111.pdf?src-supplier=Upverter, ComponentLink8URL=https://datasheet.octopart.com:443/RC0603FR-075K6L-Yageo-datasheet-98239111.pdf?src-supplier=Upverter, ComponentLink9Description=https://datasheet.octopart.com:443/RC0603FR-075K6L-Yageo-datasheet-164759695.pdf?src-supplier=Future+Electronics, ComponentLink9URL=https://datasheet.octopart.com:443/RC0603FR-075K6L-Yageo-datasheet-164759695.pdf?src-supplier=Future+Electronics, ComponentLink10Description=https://datasheet.octopart.com:443/RC0603FR-075K6L-Yageo-datasheet-137700087.pdf?src-supplier=Future+Electronics, ComponentLink10URL=https://datasheet.octopart.com:443/RC0603FR-075K6L-Yageo-datasheet-137700087.pdf?src-supplier=Future+Electronics, ComponentLink11Description=https://datasheet.octopart.com:443/RC0603FR075K6L-Yageo-datasheet-27584510.pdf?src-supplier=Future+Electronics, ComponentLink11URL=https://datasheet.octopart.com:443/RC0603FR075K6L-Yageo-datasheet-27584510.pdf?src-supplier=Future+Electronics, ComponentLink12Description=https://datasheet.octopart.com:443/RC0603FR-075K6L-Yageo-datasheet-15599030.pdf?src-supplier=Future+Electronics, ComponentLink12URL=https://datasheet.octopart.com:443/RC0603FR-075K6L-Yageo-datasheet-15599030.pdf?src-supplier=Future+Electronics, ComponentLink13Description=https://datasheet.octopart.com:443/RC0603FR-075K6L-Yageo-datasheet-12596169.pdf?src-supplier=Future+Electronics, ComponentLink13URL=https://datasheet.octopart.com:443/RC0603FR-075K6L-Yageo-datasheet-12596169.pdf?src-supplier=Future+Electronics, ComponentLink14Description=https://datasheet.octopart.com:443/RC0603FR-075K6L-Yageo-datasheet-148775077.pdf?src-supplier=TME, ComponentLink14URL=https://datasheet.octopart.com:443/RC0603FR-075K6L-Yageo-datasheet-148775077.pdf?src-supplier=TME, ComponentLink15Description=https://datasheet.octopart.com/RC0603FR-075K6L-Yageo-datasheet-73766026.pdf, ComponentLink15URL=https://datasheet.octopart.com/RC0603FR-075K6L-Yageo-datasheet-73766026.pdf, ComponentLink16Description=https://datasheet.octopart.com:443/RC0603FR-075K6L-Yageo-datasheet-118562.pdf?src-supplier=DigiKey, ComponentLink16URL=https://datasheet.octopart.com:443/RC0603FR-075K6L-Yageo-datasheet-118562.pdf?src-supplier=DigiKey, ComponentLink17Description=http://sigma.octopart.com:80/rohs_statement/Yageo-company-2.pdf?src-supplier=Compliance+Statements, ComponentLink17URL=http://sigma.octopart.com:80/rohs_statement/Yageo-company-2.pdf?src-supplier=Compliance+Statements, ComponentLink18Description=http://sigma.octopart.com:80/conflict_mineral_statement/Yageo-company-3.pdf?src-supplier=Compliance+Statements, ComponentLink18URL=http://sigma.octopart.com:80/conflict_mineral_statement/Yageo-company-3.pdf?src-supplier=Compliance+Statements, Composition="Thick Film", Depth=800µm, Features="Moisture Resistant", Height=450µm, Lead Free="Lead Free", Length=1.6mm, Lifecycle Status=Production, Military Standard=Not, Mounting Technology="Surface Mount", Number of Terminals=2, Number of Terminations=2, Packaging="Tape and Reel", Pins=2, Power Dissipation=100mW, Power Rating=100mW, Pricing="1=0,1, 10=0,009, 25=0,0088, 50=0,0082, 100=0,0051 (USD)", REACH SVHC=Yes, RoHS=Compliant, Schedule B="8533210045, 8533210045|8533210045, 8533210045|8533210045|8533210045, 8533210045|8533210045|8533210045|8533210045", Stock=87676, Supplier=DigiKey, Supplier 1=DigiKey, Supplier Part Number 1=311-5.60KHRCT-ND, Termination=SMD/SMT, Tolerance=1%, Voltage Rating (AC)=50V, Voltage Rating (DC)=50V, Weight=2.012816mg, Width=800µm
R5 R6 R7: library part "RESISTOR - GENERIC", "100mW Thick Film Resistors 75V ±100ppm/℃ ±1% 10kΩ 0603 Chip Resistor - Surface Mount ROHS", .Case/Package=0603, .Tolerance=1%, Manufacturer="Yageo Group", Manufacturer Part Number=RC0603FR-0710KL, Max Operating Temperature=155°C, Min Operating Temperature=-55°C, Power Dissipation=100mW, Supplier Part Number=311-10.0KHRCT-ND, Temperature Coefficient=100ppm/°C, Voltage Rating=75V, Voltage Rating (DC)=50V, Case Code (Imperial)=0603, Case Code (Metric)=0603, Case/Package=0603, Category="Chip SMD Resistors", China RoHS=Non-Compliant, ComponentLink1Description=https://datasheet.octopart.com:443/RC0603FR-0710KL-Yageo-datasheet-175887523.pdf?src-supplier=IHS, ComponentLink1URL=https://datasheet.octopart.com:443/RC0603FR-0710KL-Yageo-datasheet-175887523.pdf?src-supplier=IHS, ComponentLink2Description=https://datasheet.octopart.com:443/RC0603FR-0710KL-Yageo-datasheet-103092701.pdf?src-supplier=Upverter, ComponentLink2URL=https://datasheet.octopart.com:443/RC0603FR-0710KL-Yageo-datasheet-103092701.pdf?src-supplier=Upverter, ComponentLink3Description=https://datasheet.octopart.com:443/RC0603FR-0710KL-Yageo-datasheet-98239111.pdf?src-supplier=Upverter, ComponentLink3URL=https://datasheet.octopart.com:443/RC0603FR-0710KL-Yageo-datasheet-98239111.pdf?src-supplier=Upverter, ComponentLink4Description=https://datasheet.octopart.com:443/RC0603FR-0710KL-Yageo-datasheet-141265859.pdf?src-supplier=Upverter, ComponentLink4URL=https://datasheet.octopart.com:443/RC0603FR-0710KL-Yageo-datasheet-141265859.pdf?src-supplier=Upverter, ComponentLink5Description=https://sigma.octopart.com:443/138820526/technical_drawing/Yageo-RC0603FR-0710KL.pdf?src-supplier=Upverter, ComponentLink5URL=https://sigma.octopart.com:443/138820526/technical_drawing/Yageo-RC0603FR-0710KL.pdf?src-supplier=Upverter, ComponentLink6Description=https://datasheet.octopart.com:443/RC0603FR-0710KL-Yageo-datasheet-8328172.pdf?src-supplier=Farnell, ComponentLink6URL=https://datasheet.octopart.com:443/RC0603FR-0710KL-Yageo-datasheet-8328172.pdf?src-supplier=Farnell, ComponentLink7Description=https://datasheet.octopart.com:443/RC0603FR-0710KL-Yageo-datasheet-13691069.pdf?src-supplier=Farnell, ComponentLink7URL=https://datasheet.octopart.com:443/RC0603FR-0710KL-Yageo-datasheet-13691069.pdf?src-supplier=Farnell, ComponentLink8Description=https://datasheet.octopart.com:443/RC0603FR-0710KL-Yageo-datasheet-62067350.pdf?src-supplier=element14+APAC, ComponentLink8URL=https://datasheet.octopart.com:443/RC0603FR-0710KL-Yageo-datasheet-62067350.pdf?src-supplier=element14+APAC, ComponentLink9Description=https://datasheet.octopart.com:443/RC0603FR-0710KL-Yageo-datasheet-17842380.pdf?src-supplier=element14+APAC, ComponentLink9URL=https://datasheet.octopart.com:443/RC0603FR-0710KL-Yageo-datasheet-17842380.pdf?src-supplier=element14+APAC, ComponentLink10Description=https://datasheet.octopart.com:443/RC0603FR-0710KL-Yageo-datasheet-15599030.pdf?src-supplier=Future+Electronics, ComponentLink10URL=https://datasheet.octopart.com:443/RC0603FR-0710KL-Yageo-datasheet-15599030.pdf?src-supplier=Future+Electronics, ComponentLink11Description=https://datasheet.octopart.com:443/RC0603FR-0710KL-Yageo-datasheet-164759695.pdf?src-supplier=Future+Electronics, ComponentLink11URL=https://datasheet.octopart.com:443/RC0603FR-0710KL-Yageo-datasheet-164759695.pdf?src-supplier=Future+Electronics, ComponentLink12Description=https://datasheet.octopart.com:443/RC0603FR-0710KL-Yageo-datasheet-127823281.pdf?src-supplier=Future+Electronics, ComponentLink12URL=https://datasheet.octopart.com:443/RC0603FR-0710KL-Yageo-datasheet-127823281.pdf?src-supplier=Future+Electronics, ComponentLink13Description=https://datasheet.octopart.com:443/RC0603FR-0710KL-Yageo-datasheet-137700087.pdf?src-supplier=Future+Electronics, ComponentLink13URL=https://datasheet.octopart.com:443/RC0603FR-0710KL-Yageo-datasheet-137700087.pdf?src-supplier=Future+Electronics, ComponentLink14Description=https://datasheet.octopart.com:443/RC0603FR-0710KL-Yageo-datasheet-27584510.pdf?src-supplier=Future+Electronics, ComponentLink14URL=https://datasheet.octopart.com:443/RC0603FR-0710KL-Yageo-datasheet-27584510.pdf?src-supplier=Future+Electronics, ComponentLink15Description=https://datasheet.octopart.com:443/RC0603FR-0710KL-Yageo-datasheet-8324193.pdf?src-supplier=Future+Electronics, ComponentLink15URL=https://datasheet.octopart.com:443/RC0603FR-0710KL-Yageo-datasheet-8324193.pdf?src-supplier=Future+Electronics, ComponentLink16Description=https://datasheet.octopart.com:443/RC0603FR-0710KL-Yageo-datasheet-12596169.pdf?src-supplier=Newark, ComponentLink16URL=https://datasheet.octopart.com:443/RC0603FR-0710KL-Yageo-datasheet-12596169.pdf?src-supplier=Newark, ComponentLink17Description=https://datasheet.octopart.com:443/RC0603FR-0710KL-Yageo-datasheet-503470.pdf?src-supplier=Newark, ComponentLink17URL=https://datasheet.octopart.com:443/RC0603FR-0710KL-Yageo-datasheet-503470.pdf?src-supplier=Newark, ComponentLink18Description=https://datasheet.octopart.com:443/RC0603FR-0710KL-Yageo-datasheet-34211833.pdf?src-supplier=Newark, ComponentLink18URL=https://datasheet.octopart.com:443/RC0603FR-0710KL-Yageo-datasheet-34211833.pdf?src-supplier=Newark, ComponentLink19Description=https://datasheet.octopart.com:443/RC0603FR-0710KL-Yageo-datasheet-79472498.pdf?src-supplier=Megastar, ComponentLink19URL=https://datasheet.octopart.com:443/RC0603FR-0710KL-Yageo-datasheet-79472498.pdf?src-supplier=Megastar, ComponentLink20Description=https://datasheet.octopart.com/RC0603FR-0710KL-Yageo-datasheet-73766026.pdf, ComponentLink20URL=https://datasheet.octopart.com/RC0603FR-0710KL-Yageo-datasheet-73766026.pdf, ComponentLink21Description=https://datasheet.octopart.com:443/RC0603FR-0710KL-Yageo-datasheet-118562.pdf?src-supplier=DigiKey, ComponentLink21URL=https://datasheet.octopart.com:443/RC0603FR-0710KL-Yageo-datasheet-118562.pdf?src-supplier=DigiKey, ComponentLink22Description=http://sigma.octopart.com:80/conflict_mineral_statement/Yageo-company-3.pdf?src-supplier=Compliance+Statements, ComponentLink22URL=http://sigma.octopart.com:80/conflict_mineral_statement/Yageo-company-3.pdf?src-supplier=Compliance+Statements, ComponentLink23Description=http://sigma.octopart.com:80/rohs_statement/Yageo-company-2.pdf?src-supplier=Compliance+Statements, ComponentLink23URL=http://sigma.octopart.com:80/rohs_statement/Yageo-company-2.pdf?src-supplier=Compliance+Statements, Composition="Thick Film", Depth=800µm, Height=450µm, Lead Free="Lead Free", Lead Pitch=300µm, Length=1.6mm, Lifecycle Status=Production, Military Standard=Not, Mounting Technology="Surface Mount", Number of Terminals=2, Packaging="Tape & Reel", Pins=2, Power Rating=100mW, Pricing="1=0,1, 10=0,006, 25=0,0052 (USD)", REACH SVHC=Yes, RoHS=Compliant, Schedule B="8533210045, 8533210045|8533210045|8533210045|8533210045|8533210045|8533210045|8533210045|8533210045|8533210045|8533210045|8533210045|8533210045|8533210045|8533210045|8533210045|8533210045|8533210045|8533210045|8533210045|8533210045|8533210045|8533210045|8533210045|85", Stock=13522970, Supplier=DigiKey, Supplier 1=DigiKey, Supplier Part Number 1=311-10.0KHRCT-ND, Termination=SMD/SMT, Tolerance=1%, Weight=2.012816mg, Width=800µm, Working Voltage=75V

## Nets (pads, with @x,y where several pads share a name; then routed paths per layer and width w, separated by ;. In a path a pad name is that pad's centre, name@x,y a point inside that pad or via, vN(x,y) a via of type N, cw(c..) or ccw(c..) an arc to the next point about the centre after c; other vN are vias at no path point)
+3.3V: Accel.5 Accel.8 Accel.12 Antena/GPS.4 C2.1 C5.2 C6.2 C8.2 C9.2 C10.2 LDO.2 R5.2 R6.2 R7.2
+5V: C7.2 LDO.3
GND: Accel.1 Accel.2 Accel.3 Accel.6 Accel.7 Antena/GPS.3 Antena/GPS.12 C1.1 C2.2 C3.2 C4.1 C5.1 C6.1 C7.1 C8.1 C9.1 C10.1 LDO.1 R3.1
NetAccel_13: Accel.13 R5.1
NetAccel_14: Accel.14 R6.1
NetAntena/GPS_1: Antena/GPS.1 R1.2 R3.2
NetAntena/GPS_2: Antena/GPS.2 R2.2
NetAntena/GPS_5: Antena/GPS.5 C1.2 C3.1 C4.2 R4.1
NetAntena/GPS_10: Antena/GPS.10 R7.1
NetD1_K: R4.2
pads on no net: Accel.4 Accel.9 Accel.10 Accel.11 Antena/GPS.6 Antena/GPS.7 Antena/GPS.8 Antena/GPS.9 Antena/GPS.11 D1.1 D1.2 D2.1 D2.2 R1.1 R2.1

## Text inside footprints (layer, text, board x,y; h text height)
Accel: Top 3D Body "1" at 7855,1105 h19.68
Antena/GPS: Top 3D Body "1" at 10585,1585 h60
D1: Top 3D Body "*" at 10426,1090 h50 r180; Top Overlay "*" at 10474,1090 h50 r180